# EAGLE board CT_schematic (EAGLE 7.6.0)

Size 100 x 80 mm. Coordinates in mm from the lower left corner, seen from the top.
Outline: 0,0 100,0 100,80 0,80 0,0
Copper layers (1*16): Top 0.035mm / dielectric 1.5mm / Bottom 0.035mm
Design rules "default": minimum track width 10mil, minimum drill 24mil, track to track 8mil, track to pad 8mil, pad to pad 8mil, via to via 8mil, smd to smd 8mil, copper to edge 40mil, drill to drill 8mil, minimum pad ring 10mil, minimum via ring 8mil, stop-mask expansion 4mil, vias tented up to drill 0mil, thermal gap 10mil

## Footprints (pad centres in the part's own frame; a part is rotated, then mirrored left to right if it is on the bottom)
C0603 = smd 0.8 x 0.8: 1 -0.762,0; 2 0.762,0
C0402 = smd 0.5 x 0.5: 1 -0.508,0; 2 0.508,0
C1210 = smd 1.2 x 2.5: 1 -1.524,0; 2 1.524,0
C1206 = smd 1.3 x 1.6: 1 -1.524,0; 2 1.524,0
L0603 = smd 0.8 x 0.8: 1 -0.762,0; 2 0.762,0
R0603 = smd 0.8 x 0.8: 1 -0.762,0; 2 0.762,0
WLCSP49 = smd 0.25 x 0.25: A1 -1.2,1.2; A2 -0.8,1.2; A3 -0.4,1.2; A4 0,1.2; A5 0.4,1.2; A6 0.8,1.2; A7 1.2,1.2; B1 -1.2,0.8; B2 -0.8,0.8; B3 -0.4,0.8; B4 0,0.8; B5 0.4,0.8; B6 0.8,0.8; B7 1.2,0.8; C1 -1.2,0.4; C2 -0.8,0.4; C3 -0.4,0.4; C4 0,0.4; C5 0.4,0.4; C6 0.8,0.4; C7 1.2,0.4; D1 -1.2,0; D2 -0.8,0; D3 -0.4,0; D4 0,0; D5 0.4,0; D6 0.8,0; D7 1.2,0; E1 -1.2,-0.4; E2 -0.8,-0.4; E3 -0.4,-0.4; E4 0,-0.4; E5 0.4,-0.4; E6 0.8,-0.4; E7 1.2,-0.4; F1 -1.2,-0.8; F2 -0.8,-0.8; F3 -0.4,-0.8; F4 0,-0.8; F5 0.4,-0.8; F6 0.8,-0.8; F7 1.2,-0.8; G1 -1.2,-1.2; G2 -0.8,-1.2; G3 -0.4,-1.2; G4 0,-1.2; G5 0.4,-1.2; G6 0.8,-1.2; G7 1.2,-1.2
SOIC-8 = smd 1.6 x 0.6: 1 -2.7,1.905 | smd 1.55 x 0.6: 2 -2.7,0.635; 3 -2.7,-0.635; 4 -2.7,-1.905; 5 2.7,-1.905; 6 2.7,-0.635; 7 2.7,0.635; 8 2.7,1.905
AT24C02D = smd 1.6 x 0.6: 1 -2.475,1.905 | smd 1.55 x 0.6: 2 -2.475,0.635; 3 -2.475,-0.635; 4 -2.475,-1.905; 5 2.475,-1.905; 6 2.475,-0.635; 7 2.475,0.635; 8 2.475,1.905
MBH7BLZ02-109004 = smd 0.5 x 0.5: 1 0,0; 15 9.85,0; 27 9.85,8.45; 41 0,8.45 | smd 0.45 x 0.5: 2 0.725,0; 3 1.425,0; 4 2.125,0; 5 2.825,0; 6 3.525,0; 7 4.225,0; 8 4.925,0; 9 5.625,0; 10 6.325,0; 11 7.025,0; 12 7.725,0; 13 8.425,0; 14 9.125,0 | smd 0.5 x 0.45: 16 9.85,0.725; 17 9.85,1.425; 18 9.85,2.125; 19 9.85,2.825; 20 9.85,3.525; 21 9.85,4.225; 22 9.85,4.925; 23 9.85,5.625; 24 9.85,6.325; 25 9.85,7.025; 26 9.85,7.725; 28 9.15,8.45; 29 8.45,8.45; 30 7.75,8.45; 31 7.05,8.45; 32 6.35,8.45; 33 5.65,8.45; 34 4.95,8.45; 35 4.25,8.45; 36 3.55,8.45; 37 2.85,8.45; 38 2.15,8.45; 39 1.45,8.45; 40 0.75,8.45; 42 0,7.75; 43 0,7.05; 44 0,6.35; 45 0,5.65; 46 0,4.95; 47 0,4.25; 48 0,3.55; 49 0,2.85; 50 0,2.15; 51 0,1.45; 52 0,0.75 | smd 3 x 2.5: 53 3.225,2.775; 54 6.625,2.775; 55 6.625,5.675; 56 3.225,5.675
FCI_10118193-0001LF = smd 0.4 x 1.35: 1 -1.3,2.675; 2 -0.65,2.675; 3 0,2.675; 4 0.65,2.675; 5 1.3,2.675 | smd 1.6 x 1.4: 6 -3.2,2.45; 7 3.2,2.45 | smd 1.9 x 1.9: 8 -1.2,0; 9 1.2,0 | hole 0.5: -3.3,0; 3.3,0
SOT143B = smd 1 x 0.7: 1 -0.75,-1 | smd 0.6 x 0.7: 2 0.95,-1; 3 0.95,1; 4 -0.95,1
ABS07-32.768KHZ-7-T = smd 1.1 x 2.4: 1 -2.5,0; 2 0,0
ABLS-25.000MHZ-B2F-T = smd 5.6 x 2.8: 1 -3.81,0; 2 5.69,0
SOIC-8_EP = smd 1.6 x 0.533: 1 -2.921,1.905; 2 -2.921,0.635; 3 -2.921,-0.635; 4 -2.921,-1.905; 5 2.921,-1.905; 6 2.921,-0.635; 7 2.921,0.635; 8 2.921,1.905 | smd 2.54 x 3.302: EPAD 0,0 | drill 0.406 pad 0.406: P$1 -0.508,0.635; P$2 0.381,0.635; P$3 -0.508,-0.635; P$4 0.381,-0.635
DFN8_2X3MC = smd 0.813 x 0.305: 1 -1.398,0.75; 2 -1.398,0.25; 3 -1.398,-0.25; 4 -1.398,-0.75; 5 1.398,-0.75; 6 1.398,-0.25; 7 1.398,0.25; 8 1.398,0.75 | smd 1.753 x 1.549: 9 0,0
JST-2-SMD = smd 1 x 4.6: 1 -1,-3.7; 2 1,-3.7 | smd 1.6 x 3.4: NC1 -3.4,1.5; NC2 3.4,1.5
SON-6 = smd 0.55 x 0.3: 1 -0.355,0.5 | smd 0.52 x 0.3: 2 -0.37,0; 3 -0.37,-0.5; 4 0.37,-0.5; 5 0.37,0; 6 0.37,0.5
SW_4-1437565-2 = smd 1.4 x 2.1: 1 -2.23,4.55; 2 -2.23,-4.55; 3 2.23,4.55; 4 2.23,-4.55
LGM67K-G1J2-24-Z = smd 0.8 x 1.4: A -2,0; C 0,0
NC7SZ125M5X = smd 1.3 x 0.7: 1 -1.3,0.95; 2 -1.3,0; 3 -1.3,-0.95; 4 1.3,-0.95; 5 1.3,0.95
DUMMY_PACKAGE_152 = drill 0.3: 1 0,-1; 2 1.5,-1; 3 3,-1

## Placement (x,y rotation side)
C1  1e-06  [C0603]  -36.83,53.34 0 top  (outside the outline)
C2  1e-07  [C0603]  -40.64,53.34 0 top  (outside the outline)
C3  1e-07  [C0603]  -44.45,53.34 0 top  (outside the outline)
C4  1e-07  [C0603]  -48.26,53.34 0 top  (outside the outline)
C5  1e-07  [C0603]  -52.07,53.34 0 top  (outside the outline)
C6  1e-07  [C0603]  -55.88,53.34 0 top  (outside the outline)
C7  4.7e-06  [C0603]  -29.21,53.34 0 top  (outside the outline)
C8  2.2e-06  [C0603]  -33.02,53.34 0 top  (outside the outline)
C9  1e-08  [C0603]  -59.69,53.34 0 top  (outside the outline)
C10  1e-06  [C0603]  -63.5,53.34 0 top  (outside the outline)
C11  1e-11  [C0402]  -57.15,58.42 0 top  (outside the outline)
C12  1e-11  [C0402]  -60.96,58.42 0 top  (outside the outline)
C13  1e-11  [C0402]  -64.77,58.42 0 top  (outside the outline)
C14  1e-11  [C0402]  -15.24,63.5 0 top  (outside the outline)
C15  1e-06  [C0603]  -15.24,58.42 0 top  (outside the outline)
C16  1e-08  [C0402]  -19.05,63.5 0 top  (outside the outline)
C17  1e-08  [C0402]  -22.86,63.5 0 top  (outside the outline)
C18  1e-07  [C0402]  -26.67,63.5 0 top  (outside the outline)
C19  1e-07  [C0402]  -30.48,63.5 0 top  (outside the outline)
C20  1e-05  [C1210]  -57.15,35.56 0 top  (outside the outline)
C21  1e-05  [C1210]  -63.5,35.56 0 top  (outside the outline)
C22  1e-05  [C1210]  -16.51,43.18 0 top  (outside the outline)
C23  1e-05  [C1210]  -22.86,43.18 0 top  (outside the outline)
C24  1e-07  [C0402]  -34.29,63.5 0 top  (outside the outline)
C25  1e-05  [C1206]  -29.21,43.18 0 top  (outside the outline)
C26  1e-05  [C1206]  -35.56,43.18 0 top  (outside the outline)
C27  1e-08  [C0402]  -38.1,63.5 0 top  (outside the outline)
C28  1e-08  [C0402]  -41.91,63.5 0 top  (outside the outline)
F1  240.0  [L0603]  -19.05,58.42 0 top  (outside the outline)
R1  10000.0  [R0603]  -20.32,48.26 0 top  (outside the outline)
R2  1000.0  [R0603]  -22.86,58.42 0 top  (outside the outline)
R3  1600.5  [R0603]  -26.67,58.42 0 top  (outside the outline)
R4  4700.0  [R0603]  -30.48,58.42 0 top  (outside the outline)
R5  4700.0  [R0603]  -34.29,58.42 0 top  (outside the outline)
R6  2200.0  [R0603]  -38.1,58.42 0 top  (outside the outline)
R7  2200.0  [R0603]  -41.91,58.42 0 top  (outside the outline)
R8  10000.0  [R0603]  -25.4,48.26 0 top  (outside the outline)
R9  10000.0  [R0603]  -30.48,48.26 0 top  (outside the outline)
R10  10000.0  [R0603]  -35.56,48.26 0 top  (outside the outline)
R11  10000.0  [R0603]  -40.64,48.26 0 top  (outside the outline)
R12  10000.0  [R0603]  -45.72,48.26 0 top  (outside the outline)
R13  10000.0  [R0603]  -50.8,48.26 0 top  (outside the outline)
R14  10000.0  [R0603]  -55.88,48.26 0 top  (outside the outline)
R15  10000.0  [R0603]  -60.96,48.26 0 top  (outside the outline)
R16  10000.0  [R0603]  -66.04,48.26 0 top  (outside the outline)
R17  4031.5447154472  [R0603]  -57.15,41.91 0 top  (outside the outline)
R18  2200.0  [R0603]  -45.72,58.42 0 top  (outside the outline)
R19  10000.0  [R0603]  -15.24,53.34 0 top  (outside the outline)
R20  10000.0  [R0603]  -20.32,53.34 0 top  (outside the outline)
R21  9100.0  [R0603]  -49.53,58.42 0 top  (outside the outline)
R22  680000.0  [R0603]  -62.23,41.91 0 top  (outside the outline)
R23  120000.0  [R0603]  -15.24,48.26 0 top  (outside the outline)
R24  2000.0  [R0603]  -53.34,58.42 0 top  (outside the outline)
R25  10000.0  [R0603]  -25.4,53.34 0 top  (outside the outline)
U1  STM32F411CCY6  [WLCSP49]  -57.15,26.67 0 top  (outside the outline)
U2  AT25040B-SSHL-T  [SOIC-8]  -57.15,17.78 0 top  (outside the outline)
U3  AT24C02D-SSHM-T  [AT24C02D]  -40.64,17.78 0 top  (outside the outline)
U4  MBH7BLZ02-109004  [MBH7BLZ02-109004]  -35.56,1.27 0 top  (outside the outline)
U5  10118193-0001LF  [FCI_10118193-0001LF]  -19.05,26.67 0 top  (outside the outline)
U6  prtr5v0u2ax  [SOT143B]  -54.61,63.5 0 top  (outside the outline)
U7  ABS07-32.768KHZ-7-T  [ABS07-32.768KHZ-7-T]  -27.94,35.56 0 top  (outside the outline)
U8  ABLS-25.000MHZ-B2F-T  [ABLS-25.000MHZ-B2F-T]  -38.1,27.94 0 top  (outside the outline)
U9  MIC5234YME  [SOIC-8_EP]  -36.83,35.56 0 top  (outside the outline)
U10  MCP73831T-2ACI/MC  [DFN8_2X3MC]  -15.24,67.31 0 top  (outside the outline)
U11  S2B-PH-SM4-TB(LF)(SN)  [JST-2-SMD]  -22.86,19.05 0 top  (outside the outline)
U12  TPS3895ADRYR  [SON-6]  -63.5,62.23 0 top  (outside the outline)
U13  4-1437565-2  [SW_4-1437565-2]  -52.07,6.35 0 top  (outside the outline)
U14  Q65110A2395  [LGM67K-G1J2-24-Z]  -45.72,35.56 0 top  (outside the outline)
U15  nc7sz125m5x  [NC7SZ125M5X]  -40.64,41.91 0 top  (outside the outline)
U16  nc7sz125m5x  [NC7SZ125M5X]  -46.99,41.91 0 top  (outside the outline)
U17  Dummy  [DUMMY_PACKAGE_152]  -60.96,63.5 0 top  (outside the outline)

## Library data of the parts
C1-C28 F1 R1-R25 U1-U17 = circuit_tree

## Nets
CLK_CRYSTAL_U1_C6: C11.1 U1.C6 U7.1
CLK_CRYSTAL_U1_C7: C12.1 U1.C7 U7.2
CLK_CRYSTAL_U1_D6: C13.1 U1.D6 U8.1
CLK_CRYSTAL_U1_D7: C14.1 U1.D7 U8.2
GND: C1.2 C2.2 C3.2 C4.2 C5.2 C6.2 C7.2 C8.2 C9.2 C10.2 C11.2 C12.2 C13.2 C14.2 C15.2 C16.2 C17.2 C18.2 C19.2 C20.2 C21.2 C22.2 C23.2 C24.2 C25.2 C26.2 C27.2 C28.2 R2.2 R8.2 R13.2 R15.2 R16.2 R18.2 R21.2 R23.2 R24.2 U1.A6 U1.B1 U1.D3 U1.E6 U2.4 U3.4 U4.1 U4.3 U4.15 U4.27 U4.29 U4.41 U4.42 U4.43 U4.44 U4.45 U4.46 U4.47 U4.48 U4.49 U4.50 U4.52 U4.53 U4.54 U4.55 U4.56 U5.5 U5.6 U5.7 U5.8 U5.9 U6.1 U9.7 U9.EPAD U10.6 U10.9 U11.2 U12.2 U14.C U15.1 U15.3 U16.1 U16.3 U17.1
INPUT_USBPOWER_5V: C15.1 C25.1 R25.2 U1.D2 U5.1 U6.4 U10.1 U10.2
NET_U1_A5: R8.1 U1.A5
NET_U1_B5: R6.1 U1.B5 U3.6
NET_U1_B6: R9.1 U1.B6
NET_U1_C5: R7.1 U1.C5 U3.5
NET_U1_E7: R5.1 U1.E7 U16.4
NET_U1_F7: C9.1 C10.1 F1.1 U1.F7
NET_U1_G2: C8.1 U1.G2
NET_U1_G5: R3.1 U1.G5 U14.A
NET_U1_G6: R1.1 U1.G6 U13.3 U13.4
NET_U2_3: R10.1 U2.3
NET_U2_7: R12.1 U2.7
NET_U3_1: R14.1 U3.1
NET_U3_2: R15.1 U3.2
NET_U3_3: R16.1 U3.3
NET_U3_7: R13.1 U3.7
NET_U4_39: R4.1 U4.39 U15.4
NET_U9_4: R17.2 R18.1 U9.4
NET_U10_5: R25.1 U10.5
NET_U10_8: R24.1 U10.8
NET_U12_1: R20.1 R21.1 U12.1
NET_U12_3: R22.2 R23.1 U12.3
NET_U12_4: R19.1 U12.4 U15.2 U16.2
NET_U13_1: R2.1 U13.1 U13.2
PROC_ADC1_IN6: U1.F4 U17.2
PROC_ADC1_IN7: U1.F3 U17.3
PROC_SPI1_MISO: U1.A4 U2.2
PROC_SPI1_MOSI: U1.B4 U2.5
PROC_SPI1_NSS: R11.1 U1.A2 U2.1
PROC_SPI1_SCK: U1.A3 U2.6
PROC_USART2_CTS: U1.F6 U4.26
PROC_USART2_RTS: U1.G7 U4.24
PROC_USART2_RX: U1.E4 U4.25
PROC_USART2_TX: U1.E5 U4.23
PROC_USB_OTG_FS_DM: U1.C1 U5.2 U6.3
PROC_USB_OTG_FS_DP: U1.C3 U5.3 U6.2
VCC_S1_3V7: C20.1 C21.1 C26.1 U9.5 U9.8 U10.3 U10.4 U11.1
VCC_TIER1_3V3: C1.1 C2.1 C3.1 C4.1 C5.1 C6.1 C7.1 C16.1 C17.1 C18.1 C19.1 C22.1 C23.1 C24.1 C27.1 C28.1 F1.2 R1.2 R3.2 R4.2 R5.2 R6.2 R7.2 R9.2 R10.2 R11.2 R12.2 R14.2 R17.1 R19.2 R20.2 R22.1 U1.A7 U1.B2 U1.B7 U1.F2 U2.8 U3.8 U4.28 U9.1 U12.6 U15.5 U16.5

## Tracks (layer width: path | path; a pad name or v marks a point on that pad's centre or on a via)
CLK_CRYSTAL_U1_C6  (2 unrouted)
CLK_CRYSTAL_U1_C7  (2 unrouted)
CLK_CRYSTAL_U1_D6  (2 unrouted)
CLK_CRYSTAL_U1_D7  (2 unrouted)
GND  (80 unrouted)
INPUT_USBPOWER_5V  (7 unrouted)
NET_U1_A5  (1 unrouted)
NET_U1_B5  (2 unrouted)
NET_U1_B6  (1 unrouted)
NET_U1_C5  (2 unrouted)
NET_U1_E7  (2 unrouted)
NET_U1_F7  (3 unrouted)
NET_U1_G2  (1 unrouted)
NET_U1_G5  (2 unrouted)
NET_U1_G6  (3 unrouted)
NET_U2_3  (1 unrouted)
NET_U2_7  (1 unrouted)
NET_U3_1  (1 unrouted)
NET_U3_2  (1 unrouted)
NET_U3_3  (1 unrouted)
NET_U3_7  (1 unrouted)
NET_U4_39  (2 unrouted)
NET_U9_4  (2 unrouted)
NET_U10_5  (1 unrouted)
NET_U10_8  (1 unrouted)
NET_U12_1  (2 unrouted)
NET_U12_3  (2 unrouted)
NET_U12_4  (3 unrouted)
NET_U13_1  (2 unrouted)
PROC_ADC1_IN6  (1 unrouted)
PROC_ADC1_IN7  (1 unrouted)
PROC_SPI1_MISO  (1 unrouted)
PROC_SPI1_MOSI  (1 unrouted)
PROC_SPI1_NSS  (2 unrouted)
PROC_SPI1_SCK  (1 unrouted)
PROC_USART2_CTS  (1 unrouted)
PROC_USART2_RTS  (1 unrouted)
PROC_USART2_RX  (1 unrouted)
PROC_USART2_TX  (1 unrouted)
PROC_USB_OTG_FS_DM  (2 unrouted)
PROC_USB_OTG_FS_DP  (2 unrouted)
VCC_S1_3V7  (7 unrouted)
VCC_TIER1_3V3  (42 unrouted)